# EAGLE board Qwiic_Pocket_Dev_ESP32_C6-Panel (EAGLE 9.6.2), part 1 of 2
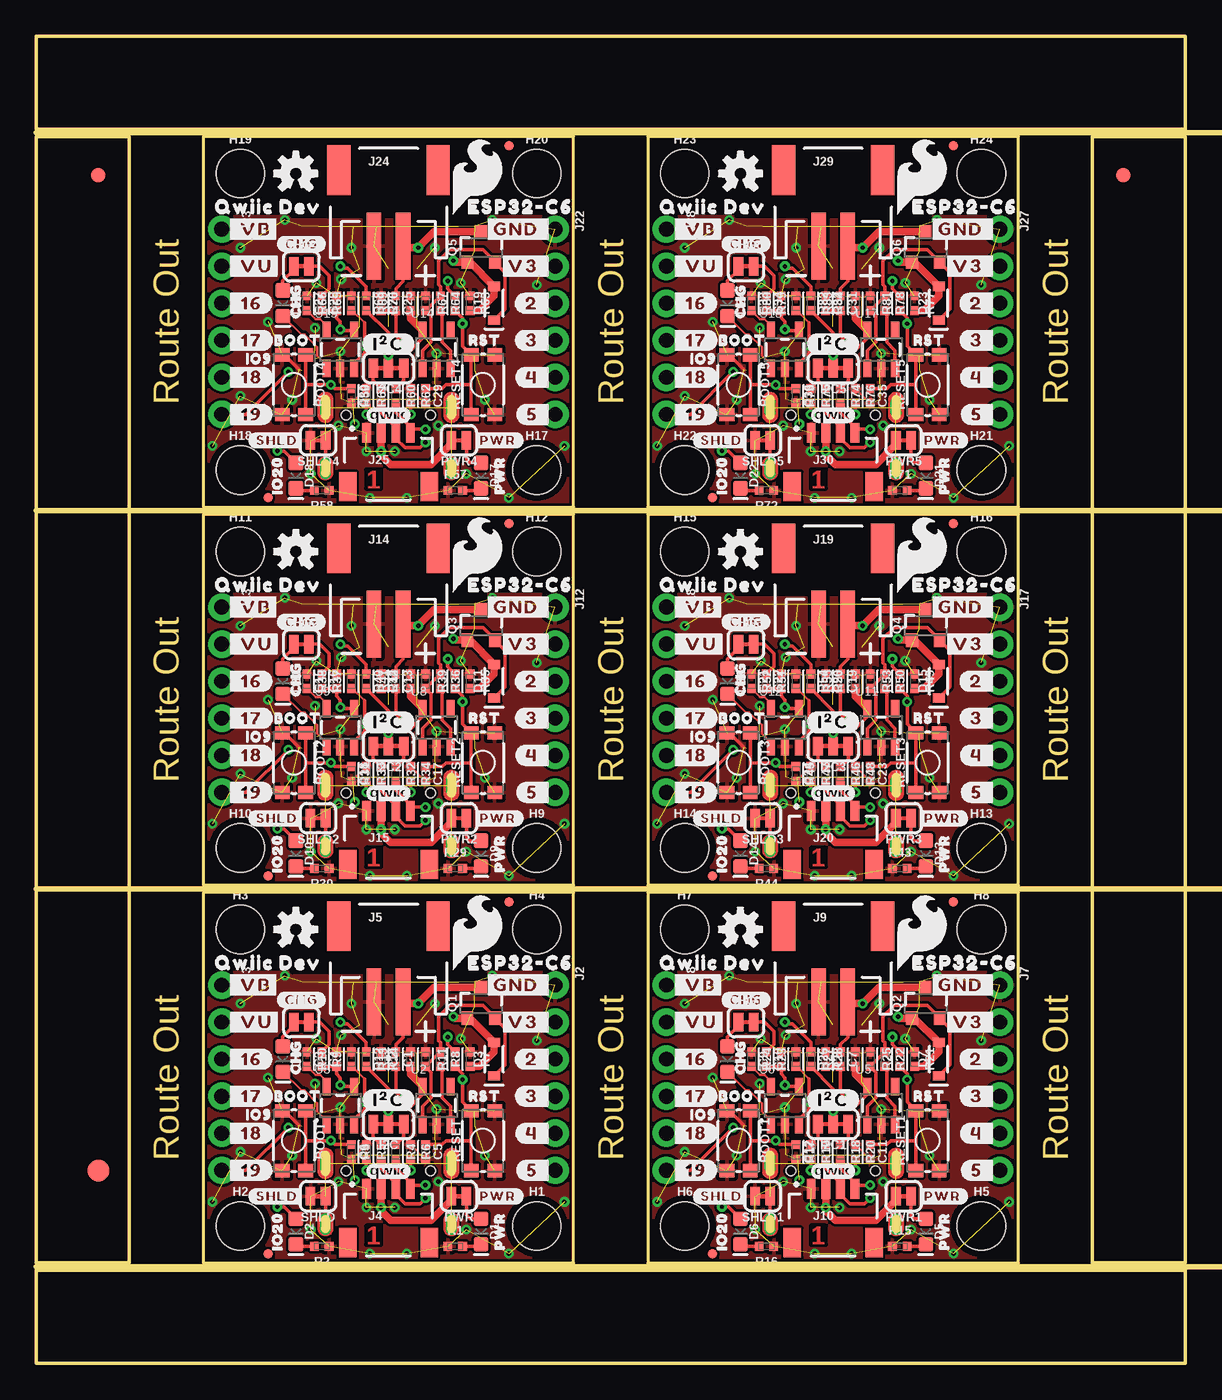
[diagram p0: board, top side]
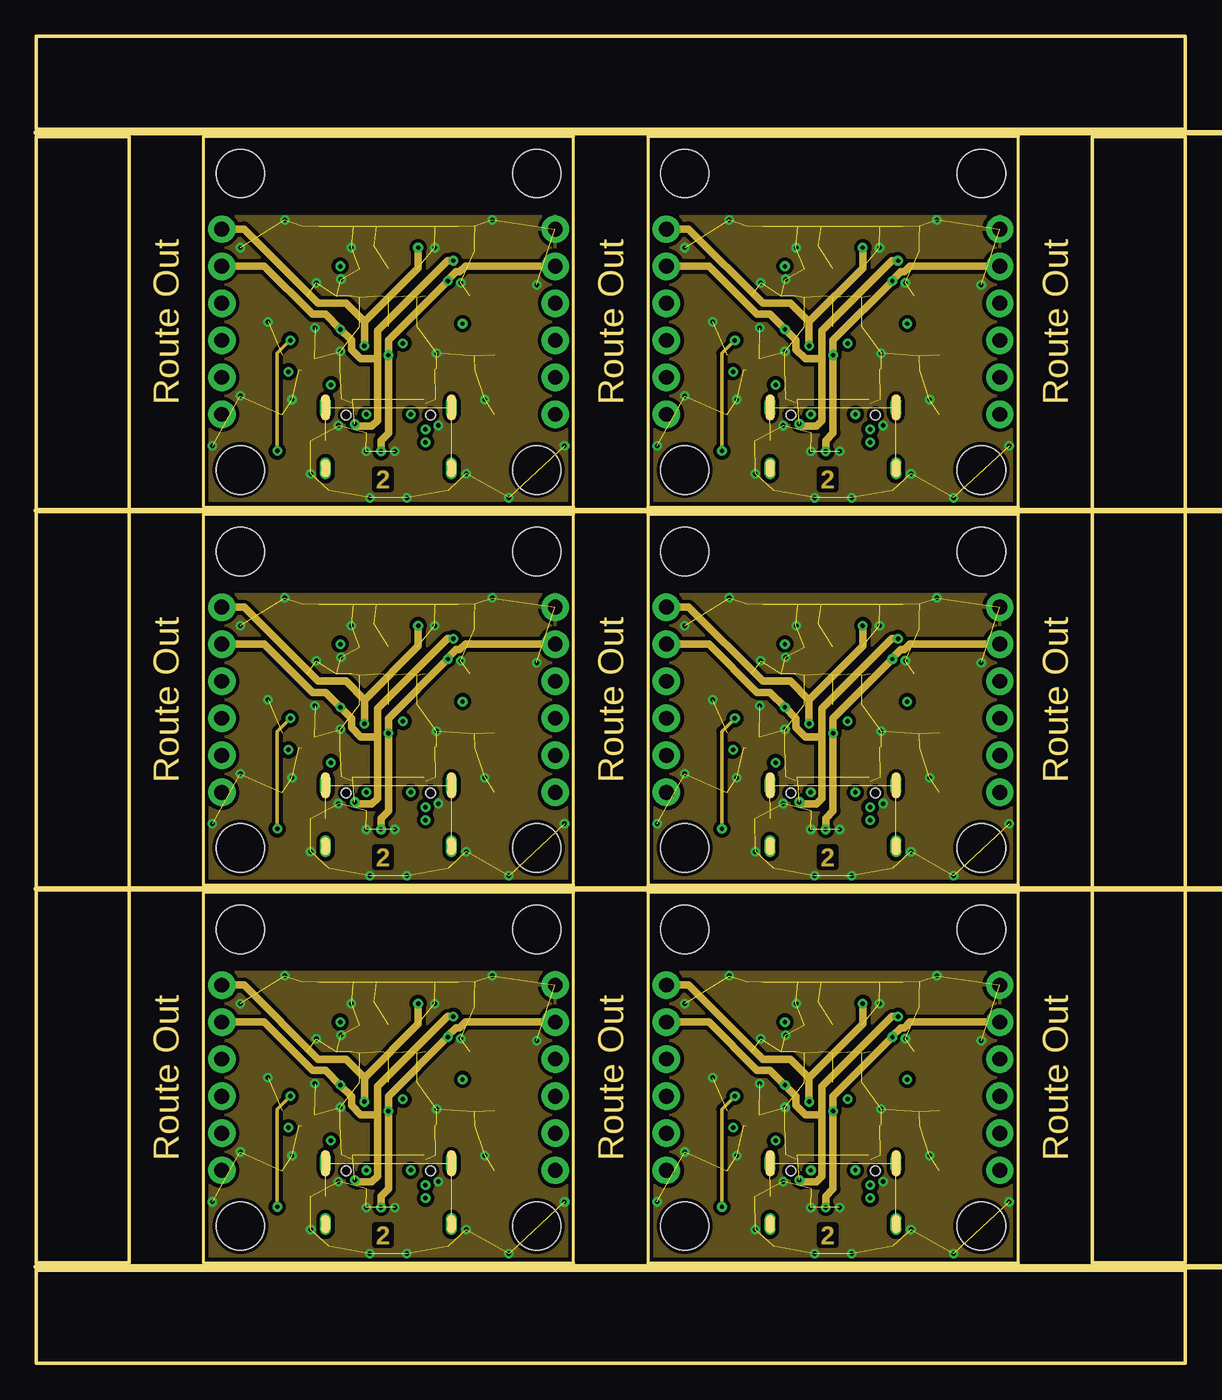
[diagram p1: board, inner layer Route2]
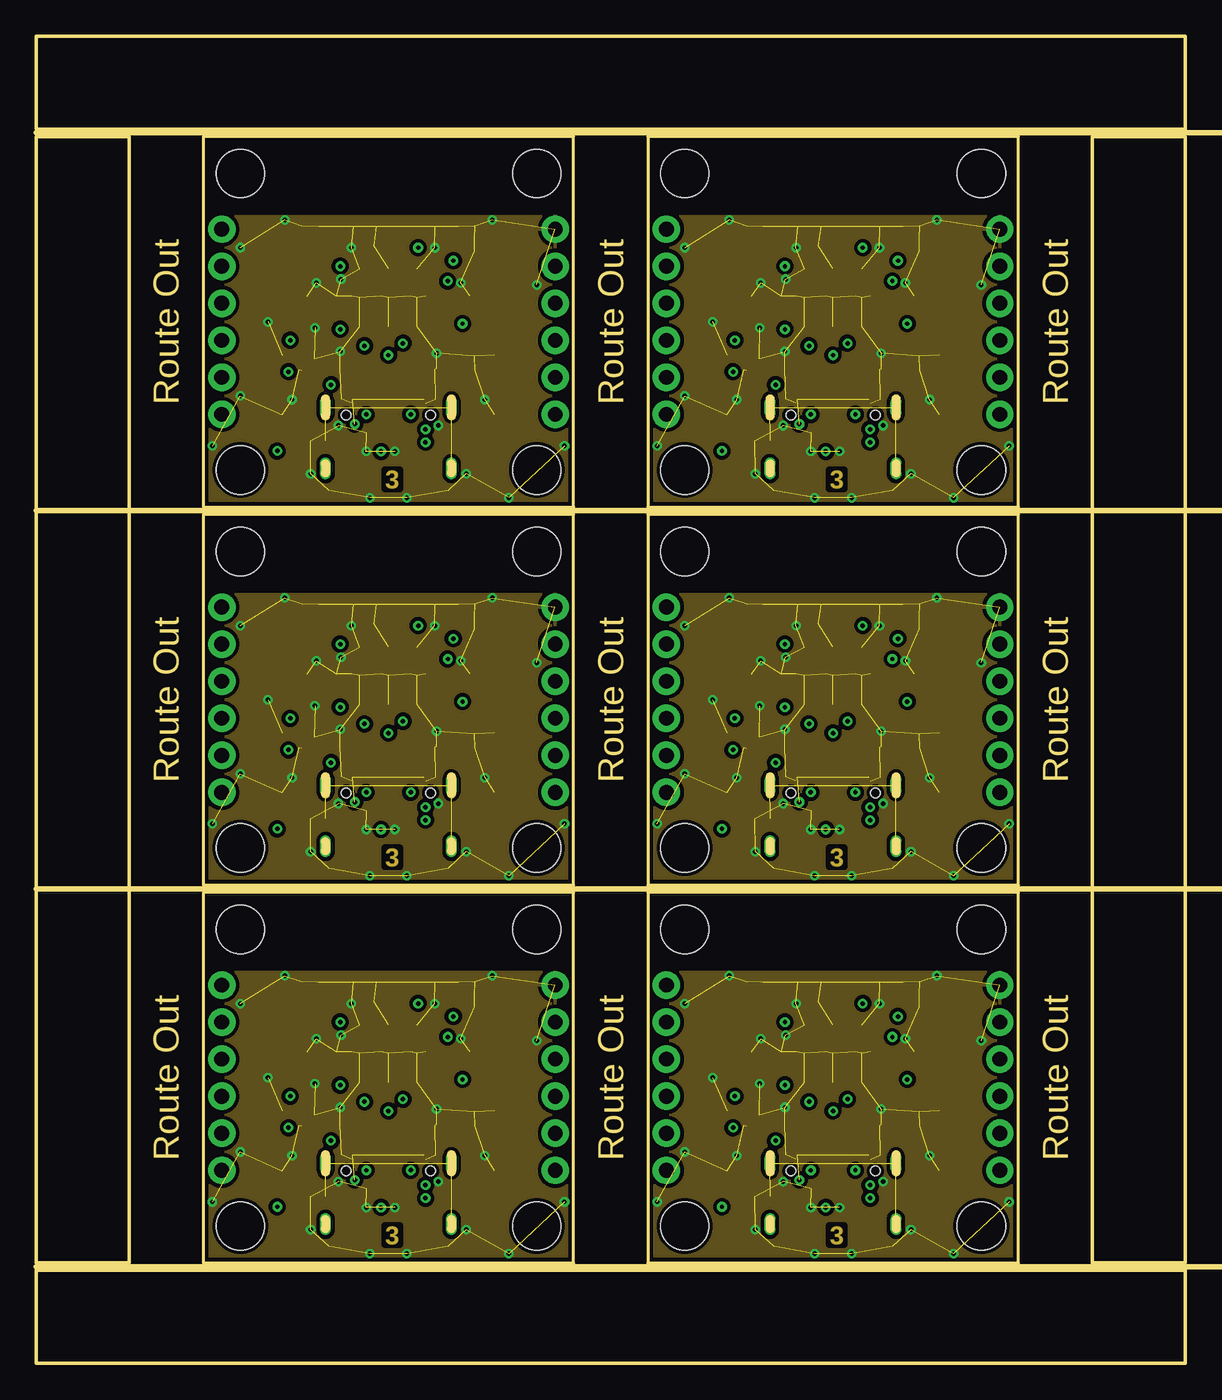
[diagram p2: board, inner layer Route15]
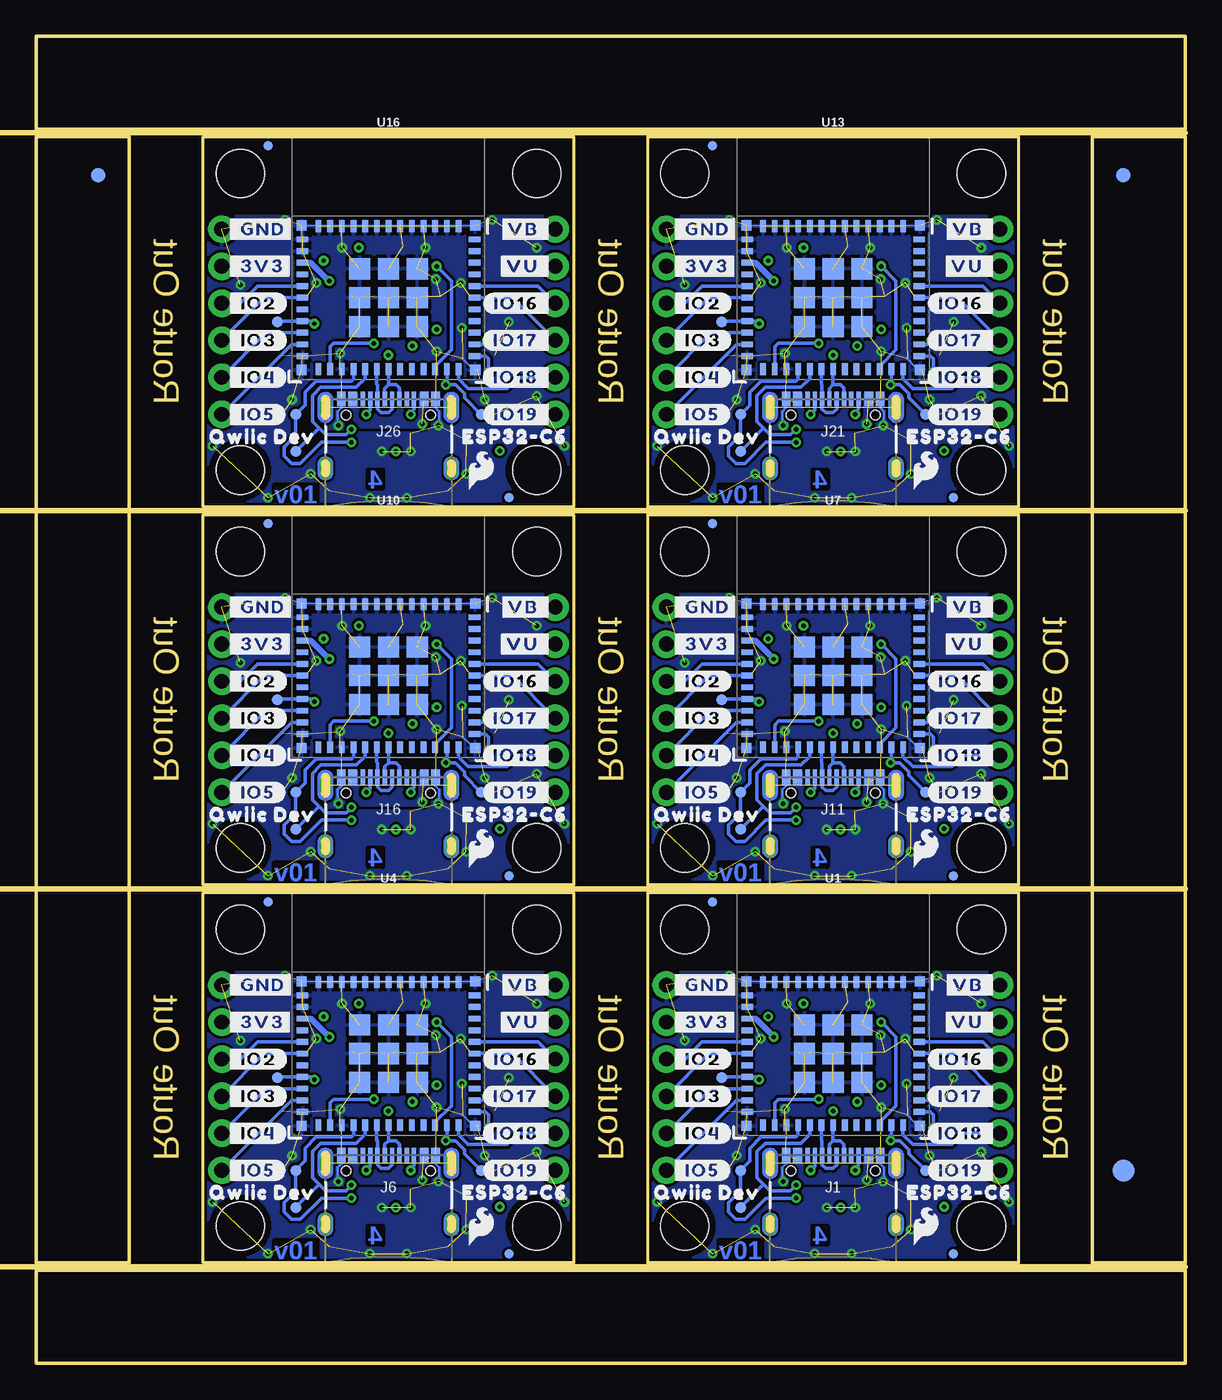
[diagram p3: board, bottom side, seen from below]

Size 78.74 x 90.93 mm. Coordinates in mm from the lower left corner, seen from the top.
Outline: 11.43,6.86 36.83,6.86 36.83,32.26 11.43,32.26 11.43,6.86
Outline: 41.91,6.86 67.31,6.86 67.31,32.26 41.91,32.26 41.91,6.86
Outline: 11.43,32.77 36.83,32.77 36.83,58.17 11.43,58.17 11.43,32.77
Outline: 41.91,32.77 67.31,32.77 67.31,58.17 41.91,58.17 41.91,32.77
Outline: 11.43,58.67 36.83,58.67 36.83,84.07 11.43,84.07 11.43,58.67
Outline: 41.91,58.67 67.31,58.67 67.31,84.07 41.91,84.07 41.91,58.67
Outline: 0,6.35 78.74,6.35 78.74,0 0,0 0,6.35
Outline: 72.39,84.07 78.74,84.07 78.74,6.86 72.39,6.86 72.39,84.07
Outline: 0,90.93 78.74,90.93 78.74,84.58 0,84.58 0,90.93
Outline: 0,84.07 6.35,84.07 6.35,6.86 0,6.86 0,84.07
Copper layers (1+2*15+16): Top 0.035559375mm / dielectric 0.47751875mm / Route2 0.035559375mm / dielectric 0.47751875mm / Route15 0.035559375mm / dielectric 0.47751875mm / Bottom 0.035559375mm
Design rules "Qwiic_Pocket_Dev_ESP32_C6": minimum track width 7mil, minimum drill 12mil, track to track 7mil, track to pad 7mil, pad to pad 7mil, via to via 7mil, smd to smd 7mil, copper to edge 7mil, drill to drill 7mil, minimum pad ring 7mil, minimum via ring 7mil, stop-mask expansion 3mil, vias tented up to drill 25mil, thermal gap 10mil
tRestrict: area 30.5,26.4 to 30.7,26.7; area 61,26.4 to 61.2,26.7; area 30.5,52.3 to 30.7,52.6; area 61,52.3 to 61.2,52.6; area 30.5,78.2 to 30.7,78.5; area 61,78.2 to 61.2,78.5
bRestrict: area 20.8,15 to 21.1,15.2; area 51.3,15 to 51.6,15.2; area 20.8,40.9 to 21.1,41.1; area 51.3,40.9 to 51.6,41.1; area 20.8,66.8 to 21.1,67.1; area 51.3,66.8 to 51.6,67.1
Milling: 4 lines

## Footprints (pad centres in the part's own frame; a part is rotated, then mirrored left to right if it is on the bottom)
TACTILE_SWITCH_SMD_4.6X2.8MM = smd 0.9 x 1: 1 -2.05,-0.8; 2 2.05,-0.8; 3 2.05,0.8; 4 -2.05,0.8
0402-TIGHT = smd 0.6 x 0.6: 1 -0.5,0; 2 0.5,0
SMT-JUMPER_2_NC_TRACE_SILK = smd 0.66 x 1.27: 1 -0.521,0; 2 0.521,0
LED-0603 = smd 1 x 1: A -0.877,0; C 0.877,0
SOD-323 = smd 0.63 x 0.83: A 1.15,0; C -1.15,0
FIDUCIAL-1X2 = smd 1 x 1: 1 0,0
FIDUCIAL-1.5X3 = smd 1.5 x 1.5: 1 0,0
FIDUCIAL-MICRO = smd 0.635 x 0.635: 1 0,0
STAND-OFF = hole 3.302: 0,0
SMT-JUMPER_3_2-NC_TRACE_SILK = smd 0.66 x 1.27: 1 -1.041,0; 2 0,0; 3 1.041,0
USB-C-16P_4LAYER-PADS = smd 0.3 x 1: A5 -1.25,-0.34; A6 -0.25,-0.34; A7 0.25,-0.34; A8 1.25,-0.34; B5 1.75,-0.34; B6 0.75,-0.34; B7 -0.75,-0.34; B8 -1.75,-0.34 | smd 0.6 x 1: GND -3.225,-0.34; GND2 3.225,-0.34; VBUS1 -2.45,-0.34; VBUS2 2.45,-0.34 | drill 0.4 pad 0.6 long: SHLD1 -4.318,-0.915; SHLD2 4.318,-0.915; SHLD3 -4.318,-5.095; SHLD4 4.318,-5.095 | hole 0.65: -2.89,-1.445; 2.89,-1.445
1X06_NO_SILK = drill 1.016 pad 1.88: 1 0,0; 2 2.54,0; 3 5.08,0; 4 7.62,0; 5 10.16,0; 6 12.7,0
JST04_1MM_RA = smd 0.6 x 1.35: 1 -1.5,0; 2 -0.5,0; 3 0.5,0; 4 1.5,0 | smd 1.2 x 2: NC1 2.8,-3.675; NC2 -2.8,-3.675
JST-2-SMD = smd 1 x 4.6: 1 -1,-3.7; 2 1,-3.7 | smd 1.6 x 3.4: NC1 -3.4,1.5; NC2 3.4,1.5
SOT23-3 = smd 0.8 x 0.9: 1 -0.95,-1; 2 0.95,-1; 3 0,1.1
PAD.03X.03 = smd 0.762 x 0.762: 1 0,0
ESP32-C6-MINI-1 = smd 0.8 x 0.4: 1 -5.9,4; 2 -5.9,3.2; 3 -5.9,2.4; 4 -5.9,1.6; 5 -5.9,0.8; 6 -5.9,0; 7 -5.9,-0.8; 8 -5.9,-1.6; 9 -5.9,-2.4; 10 -5.9,-3.2; 11 -5.9,-4; 25 5.9,-4; 26 5.9,-3.2; 27 5.9,-2.4; 28 5.9,-1.6; 29 5.9,-0.8; 30 5.9,0; 31 5.9,0.8; 32 5.9,1.6; 33 5.9,2.4; 34 5.9,3.2; 35 5.9,4 | smd 0.4 x 0.8: 12 -4.8,-4.9; 13 -4,-4.9; 14 -3.2,-4.9; 15 -2.4,-4.9; 16 -1.6,-4.9; 17 -0.8,-4.9; 18 0,-4.9; 19 0.8,-4.9; 20 1.6,-4.9; 21 2.4,-4.9; 22 3.2,-4.9; 23 4,-4.9; 24 4.8,-4.9; 36 4.8,4.9; 37 4,4.9; 38 3.2,4.9; 39 2.4,4.9; 40 1.6,4.9; 41 0.8,4.9; 42 0,4.9; 43 -0.8,4.9; 44 -1.6,4.9; 45 -2.4,4.9; 46 -3.2,4.9; 47 -4,4.9; 48 -4.8,4.9 | smd 1.45 x 1.45: 49.1 -1.975,1.975; 49.2 -1.975,0; 49.3 -1.975,-1.975; 49.4 0,-1.975; 49.5 1.975,-1.975; 49.6 1.975,0; 49.7 1.975,1.975; 49.8 0,1.975; 49.9 0,0 | smd 0.7 x 0.7: 50 5.95,4.95; 51 5.95,-4.95; 52 -5.95,-4.95; 53 -5.95,4.95
SOT23-5 = smd 0.55 x 1.2: 1 -0.95,-1.3; 2 0,-1.3; 3 0.95,-1.3; 4 0.95,1.3; 5 -0.95,1.3

## Placement (x,y rotation side)
BOOT  MOMENTARY-SWITCH-SPST-SMD-4.6X2.8MM  [TACTILE_SWITCH_SMD_4.6X2.8MM]  17.65,15.24 270 top
BOOT1  MOMENTARY-SWITCH-SPST-SMD-4.6X2.8MM  [TACTILE_SWITCH_SMD_4.6X2.8MM]  48.13,15.24 270 top
BOOT2  MOMENTARY-SWITCH-SPST-SMD-4.6X2.8MM  [TACTILE_SWITCH_SMD_4.6X2.8MM]  17.65,41.15 270 top
BOOT3  MOMENTARY-SWITCH-SPST-SMD-4.6X2.8MM  [TACTILE_SWITCH_SMD_4.6X2.8MM]  48.13,41.15 270 top
BOOT4  MOMENTARY-SWITCH-SPST-SMD-4.6X2.8MM  [TACTILE_SWITCH_SMD_4.6X2.8MM]  17.65,67.06 270 top
BOOT5  MOMENTARY-SWITCH-SPST-SMD-4.6X2.8MM  [TACTILE_SWITCH_SMD_4.6X2.8MM]  48.13,67.06 270 top
C1  2.2uF  [0402-TIGHT]  26.67,20.83 90 top
C2  2.2uF  [0402-TIGHT]  25.65,20.83 90 top
C3  2.2uF  [0402-TIGHT]  20.57,20.83 90 top
C4  2.2uF  [0402-TIGHT]  21.59,20.83 90 top
C5  0.1uF  [0402-TIGHT]  26.67,14.48 270 top
C6  0.1uF  [0402-TIGHT]  21.59,14.48 270 top
C7  2.2uF  [0402-TIGHT]  57.15,20.83 90 top
C8  2.2uF  [0402-TIGHT]  56.13,20.83 90 top
C9  2.2uF  [0402-TIGHT]  51.05,20.83 90 top
C10  2.2uF  [0402-TIGHT]  52.07,20.83 90 top
C11  0.1uF  [0402-TIGHT]  57.15,14.48 270 top
C12  0.1uF  [0402-TIGHT]  52.07,14.48 270 top
C13  2.2uF  [0402-TIGHT]  26.67,46.74 90 top
C14  2.2uF  [0402-TIGHT]  25.65,46.74 90 top
C15  2.2uF  [0402-TIGHT]  20.57,46.74 90 top
C16  2.2uF  [0402-TIGHT]  21.59,46.74 90 top
C17  0.1uF  [0402-TIGHT]  26.67,40.39 270 top
C18  0.1uF  [0402-TIGHT]  21.59,40.39 270 top
C19  2.2uF  [0402-TIGHT]  57.15,46.74 90 top
C20  2.2uF  [0402-TIGHT]  56.13,46.74 90 top
C21  2.2uF  [0402-TIGHT]  51.05,46.74 90 top
C22  2.2uF  [0402-TIGHT]  52.07,46.74 90 top
C23  0.1uF  [0402-TIGHT]  57.15,40.39 270 top
C24  0.1uF  [0402-TIGHT]  52.07,40.39 270 top
C25  2.2uF  [0402-TIGHT]  26.67,72.64 90 top
C26  2.2uF  [0402-TIGHT]  25.65,72.64 90 top
C27  2.2uF  [0402-TIGHT]  20.57,72.64 90 top
C28  2.2uF  [0402-TIGHT]  21.59,72.64 90 top
C29  0.1uF  [0402-TIGHT]  26.67,66.29 270 top
C30  0.1uF  [0402-TIGHT]  21.59,66.29 270 top
C31  2.2uF  [0402-TIGHT]  57.15,72.64 90 top
C32  2.2uF  [0402-TIGHT]  56.13,72.64 90 top
C33  2.2uF  [0402-TIGHT]  51.05,72.64 90 top
C34  2.2uF  [0402-TIGHT]  52.07,72.64 90 top
C35  0.1uF  [0402-TIGHT]  57.15,66.29 270 top
C36  0.1uF  [0402-TIGHT]  52.07,66.29 270 top
CHG  JUMPER-SMT_2_NC_TRACE_SILK  [SMT-JUMPER_2_NC_TRACE_SILK]  18.16,23.37 0 top
CHG1  JUMPER-SMT_2_NC_TRACE_SILK  [SMT-JUMPER_2_NC_TRACE_SILK]  48.64,23.37 0 top
CHG2  JUMPER-SMT_2_NC_TRACE_SILK  [SMT-JUMPER_2_NC_TRACE_SILK]  18.16,49.28 0 top
CHG3  JUMPER-SMT_2_NC_TRACE_SILK  [SMT-JUMPER_2_NC_TRACE_SILK]  48.64,49.28 0 top
CHG4  JUMPER-SMT_2_NC_TRACE_SILK  [SMT-JUMPER_2_NC_TRACE_SILK]  18.16,75.18 0 top
CHG5  JUMPER-SMT_2_NC_TRACE_SILK  [SMT-JUMPER_2_NC_TRACE_SILK]  48.64,75.18 0 top
D1  [LED-0603]  30.48,9.02 270 top
D2  BLUE  [LED-0603]  17.78,9.02 270 top
D3  1A/23V/620mV  [SOD-323]  31.37,20.83 90 top
D4  Yellow  [LED-0603]  16.89,20.83 270 top
D5  [LED-0603]  60.96,9.02 270 top
D6  BLUE  [LED-0603]  48.26,9.02 270 top
D7  1A/23V/620mV  [SOD-323]  61.85,20.83 90 top
D8  Yellow  [LED-0603]  47.37,20.83 270 top
D9  [LED-0603]  30.48,34.92 270 top
D10  BLUE  [LED-0603]  17.78,34.92 270 top
D11  1A/23V/620mV  [SOD-323]  31.37,46.74 90 top
D12  Yellow  [LED-0603]  16.89,46.74 270 top
D13  [LED-0603]  60.96,34.92 270 top
D14  BLUE  [LED-0603]  48.26,34.92 270 top
D15  1A/23V/620mV  [SOD-323]  61.85,46.74 90 top
D16  Yellow  [LED-0603]  47.37,46.74 270 top
D17  [LED-0603]  30.48,60.83 270 top
D18  BLUE  [LED-0603]  17.78,60.83 270 top
D19  1A/23V/620mV  [SOD-323]  31.37,72.64 90 top
D20  Yellow  [LED-0603]  16.89,72.64 270 top
D21  [LED-0603]  60.96,60.83 270 top
D22  BLUE  [LED-0603]  48.26,60.83 270 top
D23  1A/23V/620mV  [SOD-323]  61.85,72.64 90 top
D24  Yellow  [LED-0603]  47.37,72.64 270 top
E$1  [FIDUCIAL-1X2]  4.23,81.41 0 top
E$2  [FIDUCIAL-1X2]  4.23,81.41 0 bottom
E$3  [FIDUCIAL-1X2]  74.51,81.41 0 top
E$4  [FIDUCIAL-1X2]  74.51,81.41 0 bottom
E$5  [FIDUCIAL-1.5X3]  4.23,13.21 0 top
E$6  [FIDUCIAL-1.5X3]  4.23,13.21 0 bottom
FD1  FIDUCIALUFIDUCIAL  [FIDUCIAL-MICRO]  32.38,31.62 0 bottom
FD2  FIDUCIALUFIDUCIAL  [FIDUCIAL-MICRO]  32.38,31.62 0 top
FD3  FIDUCIALUFIDUCIAL  [FIDUCIAL-MICRO]  15.88,7.49 0 bottom
FD4  FIDUCIALUFIDUCIAL  [FIDUCIAL-MICRO]  15.88,7.49 0 top
FD5  FIDUCIALUFIDUCIAL  [FIDUCIAL-MICRO]  62.87,31.62 0 bottom
FD6  FIDUCIALUFIDUCIAL  [FIDUCIAL-MICRO]  62.87,31.62 0 top
FD7  FIDUCIALUFIDUCIAL  [FIDUCIAL-MICRO]  46.35,7.49 0 bottom
FD8  FIDUCIALUFIDUCIAL  [FIDUCIAL-MICRO]  46.35,7.49 0 top
FD9  FIDUCIALUFIDUCIAL  [FIDUCIAL-MICRO]  32.38,57.53 0 bottom
FD10  FIDUCIALUFIDUCIAL  [FIDUCIAL-MICRO]  32.38,57.53 0 top
FD11  FIDUCIALUFIDUCIAL  [FIDUCIAL-MICRO]  15.88,33.4 0 bottom
FD12  FIDUCIALUFIDUCIAL  [FIDUCIAL-MICRO]  15.88,33.4 0 top
FD13  FIDUCIALUFIDUCIAL  [FIDUCIAL-MICRO]  62.87,57.53 0 bottom
FD14  FIDUCIALUFIDUCIAL  [FIDUCIAL-MICRO]  62.87,57.53 0 top
FD15  FIDUCIALUFIDUCIAL  [FIDUCIAL-MICRO]  46.35,33.4 0 bottom
FD16  FIDUCIALUFIDUCIAL  [FIDUCIAL-MICRO]  46.35,33.4 0 top
FD17  FIDUCIALUFIDUCIAL  [FIDUCIAL-MICRO]  32.38,83.44 0 bottom
FD18  FIDUCIALUFIDUCIAL  [FIDUCIAL-MICRO]  32.38,83.44 0 top
FD19  FIDUCIALUFIDUCIAL  [FIDUCIAL-MICRO]  15.88,59.31 0 bottom
FD20  FIDUCIALUFIDUCIAL  [FIDUCIAL-MICRO]  15.88,59.31 0 top
FD21  FIDUCIALUFIDUCIAL  [FIDUCIAL-MICRO]  62.87,83.44 0 bottom
FD22  FIDUCIALUFIDUCIAL  [FIDUCIAL-MICRO]  62.87,83.44 0 top
FD23  FIDUCIALUFIDUCIAL  [FIDUCIAL-MICRO]  46.35,59.31 0 bottom
FD24  FIDUCIALUFIDUCIAL  [FIDUCIAL-MICRO]  46.35,59.31 0 top
FRAME1  FRAME-LETTER  [CREATIVE_COMMONS]  1.27,-18.54 0 top  (outside the outline)
FRAME2  FRAME-LETTER  [CREATIVE_COMMONS]  31.75,-18.54 0 top  (outside the outline)
FRAME3  FRAME-LETTER  [CREATIVE_COMMONS]  1.27,7.37 0 top
FRAME4  FRAME-LETTER  [CREATIVE_COMMONS]  31.75,7.37 0 top
FRAME5  FRAME-LETTER  [CREATIVE_COMMONS]  1.27,33.27 0 top
FRAME6  FRAME-LETTER  [CREATIVE_COMMONS]  31.75,33.27 0 top
H1  STAND-OFF  [STAND-OFF]  34.29,9.4 0 top
H2  STAND-OFF  [STAND-OFF]  13.97,9.4 0 top
H3  STAND-OFF  [STAND-OFF]  13.97,29.72 0 top
H4  STAND-OFF  [STAND-OFF]  34.29,29.72 0 top
H5  STAND-OFF  [STAND-OFF]  64.77,9.4 0 top
H6  STAND-OFF  [STAND-OFF]  44.45,9.4 0 top
H7  STAND-OFF  [STAND-OFF]  44.45,29.72 0 top
H8  STAND-OFF  [STAND-OFF]  64.77,29.72 0 top
H9  STAND-OFF  [STAND-OFF]  34.29,35.31 0 top
H10  STAND-OFF  [STAND-OFF]  13.97,35.31 0 top
H11  STAND-OFF  [STAND-OFF]  13.97,55.63 0 top
H12  STAND-OFF  [STAND-OFF]  34.29,55.63 0 top
H13  STAND-OFF  [STAND-OFF]  64.77,35.31 0 top
H14  STAND-OFF  [STAND-OFF]  44.45,35.31 0 top
H15  STAND-OFF  [STAND-OFF]  44.45,55.63 0 top
H16  STAND-OFF  [STAND-OFF]  64.77,55.63 0 top
H17  STAND-OFF  [STAND-OFF]  34.29,61.21 0 top
H18  STAND-OFF  [STAND-OFF]  13.97,61.21 0 top
H19  STAND-OFF  [STAND-OFF]  13.97,81.53 0 top
H20  STAND-OFF  [STAND-OFF]  34.29,81.53 0 top
H21  STAND-OFF  [STAND-OFF]  64.77,61.21 0 top
H22  STAND-OFF  [STAND-OFF]  44.45,61.21 0 top
H23  STAND-OFF  [STAND-OFF]  44.45,81.53 0 top
H24  STAND-OFF  [STAND-OFF]  64.77,81.53 0 top
I2C  JUMPER-SMT_3_2-NC_TRACE_SILK  [SMT-JUMPER_3_2-NC_TRACE_SILK]  24.13,16.38 180 top
I2C1  JUMPER-SMT_3_2-NC_TRACE_SILK  [SMT-JUMPER_3_2-NC_TRACE_SILK]  54.61,16.38 180 top
I2C2  JUMPER-SMT_3_2-NC_TRACE_SILK  [SMT-JUMPER_3_2-NC_TRACE_SILK]  24.13,42.29 180 top
I2C3  JUMPER-SMT_3_2-NC_TRACE_SILK  [SMT-JUMPER_3_2-NC_TRACE_SILK]  54.61,42.29 180 top
I2C4  JUMPER-SMT_3_2-NC_TRACE_SILK  [SMT-JUMPER_3_2-NC_TRACE_SILK]  24.13,68.2 180 top
I2C5  JUMPER-SMT_3_2-NC_TRACE_SILK  [SMT-JUMPER_3_2-NC_TRACE_SILK]  54.61,68.2 180 top
J1  USB Female Type C Connector  [USB-C-16P_4LAYER-PADS]  24.13,14.61 0 bottom
J2  [1X06_NO_SILK]  35.56,25.91 270 top
J3  [1X06_NO_SILK]  12.7,25.91 270 top
J4  QWIIC_RIGHT_ANGLE  [JST04_1MM_RA]  24.13,11.94 0 top
J5  [JST-2-SMD]  24.13,28.45 0 top
J6  USB Female Type C Connector  [USB-C-16P_4LAYER-PADS]  54.61,14.61 0 bottom
J7  [1X06_NO_SILK]  66.04,25.91 270 top
J8  [1X06_NO_SILK]  43.18,25.91 270 top
J9  [JST-2-SMD]  54.61,28.45 0 top
J10  QWIIC_RIGHT_ANGLE  [JST04_1MM_RA]  54.61,11.94 0 top
J11  USB Female Type C Connector  [USB-C-16P_4LAYER-PADS]  24.13,40.51 0 bottom
J12  [1X06_NO_SILK]  35.56,51.82 270 top
J13  [1X06_NO_SILK]  12.7,51.82 270 top
J14  [JST-2-SMD]  24.13,54.36 0 top
J15  QWIIC_RIGHT_ANGLE  [JST04_1MM_RA]  24.13,37.85 0 top
J16  USB Female Type C Connector  [USB-C-16P_4LAYER-PADS]  54.61,40.51 0 bottom
J17  [1X06_NO_SILK]  66.04,51.82 270 top
J18  [1X06_NO_SILK]  43.18,51.82 270 top
J19  [JST-2-SMD]  54.61,54.36 0 top
J20  QWIIC_RIGHT_ANGLE  [JST04_1MM_RA]  54.61,37.85 0 top
J21  USB Female Type C Connector  [USB-C-16P_4LAYER-PADS]  24.13,66.42 0 bottom
J22  [1X06_NO_SILK]  35.56,77.72 270 top
J23  [1X06_NO_SILK]  12.7,77.72 270 top
J24  [JST-2-SMD]  24.13,80.26 0 top
J25  QWIIC_RIGHT_ANGLE  [JST04_1MM_RA]  24.13,63.75 0 top
J26  USB Female Type C Connector  [USB-C-16P_4LAYER-PADS]  54.61,66.42 0 bottom
J27  [1X06_NO_SILK]  66.04,77.72 270 top
J28  [1X06_NO_SILK]  43.18,77.72 270 top
J29  [JST-2-SMD]  54.61,80.26 0 top
J30  QWIIC_RIGHT_ANGLE  [JST04_1MM_RA]  54.61,63.75 0 top
LOGO1  SFE_LOGO_NAME_FLAMEBLANK  [BLANK]  2.54,-18.54 0 top  (outside the outline)
LOGO2  OSHW-LOGOS  [OSHW-LOGO-S]  17.78,29.72 0 top
LOGO3  QWIIC_LOGO_3MM  [QWIIC_3MM]  24.13,13.14 0 top
LOGO4  SFE_LOGO_NAME_FLAMEBLANK  [BLANK]  33.02,-18.54 0 top  (outside the outline)
LOGO5  OSHW-LOGOS  [OSHW-LOGO-S]  48.26,29.72 0 top
LOGO6  QWIIC_LOGO_3MM  [QWIIC_3MM]  54.61,13.14 0 top
LOGO7  SFE_LOGO_NAME_FLAMEBLANK  [BLANK]  2.54,7.37 0 top
LOGO8  OSHW-LOGOS  [OSHW-LOGO-S]  17.78,55.63 0 top
LOGO9  QWIIC_LOGO_3MM  [QWIIC_3MM]  24.13,39.05 0 top
LOGO10  SFE_LOGO_NAME_FLAMEBLANK  [BLANK]  33.02,7.37 0 top
LOGO11  OSHW-LOGOS  [OSHW-LOGO-S]  48.26,55.63 0 top
LOGO12  QWIIC_LOGO_3MM  [QWIIC_3MM]  54.61,39.05 0 top
LOGO13  SFE_LOGO_NAME_FLAMEBLANK  [BLANK]  2.54,33.27 0 top
LOGO14  OSHW-LOGOS  [OSHW-LOGO-S]  17.78,81.53 0 top
LOGO15  QWIIC_LOGO_3MM  [QWIIC_3MM]  24.13,64.96 0 top
LOGO16  SFE_LOGO_NAME_FLAMEBLANK  [BLANK]  33.02,33.27 0 top
LOGO17  OSHW-LOGOS  [OSHW-LOGO-S]  48.26,81.53 0 top
LOGO18  QWIIC_LOGO_3MM  [QWIIC_3MM]  54.61,64.96 0 top
PWR  JUMPER-SMT_2_NC_TRACE_SILK  [SMT-JUMPER_2_NC_TRACE_SILK]  28.96,11.43 180 top
PWR1  JUMPER-SMT_2_NC_TRACE_SILK  [SMT-JUMPER_2_NC_TRACE_SILK]  59.44,11.43 180 top
PWR2  JUMPER-SMT_2_NC_TRACE_SILK  [SMT-JUMPER_2_NC_TRACE_SILK]  28.96,37.34 180 top
PWR3  JUMPER-SMT_2_NC_TRACE_SILK  [SMT-JUMPER_2_NC_TRACE_SILK]  59.44,37.34 180 top
PWR4  JUMPER-SMT_2_NC_TRACE_SILK  [SMT-JUMPER_2_NC_TRACE_SILK]  28.96,63.25 180 top
PWR5  JUMPER-SMT_2_NC_TRACE_SILK  [SMT-JUMPER_2_NC_TRACE_SILK]  59.44,63.25 180 top
Q1  20V/4.2A/52mΩ/1.4W  [SOT23-3]  30.48,24.64 0 top
Q2  20V/4.2A/52mΩ/1.4W  [SOT23-3]  60.96,24.64 0 top
Q3  20V/4.2A/52mΩ/1.4W  [SOT23-3]  30.48,50.55 0 top
Q4  20V/4.2A/52mΩ/1.4W  [SOT23-3]  60.96,50.55 0 top
Q5  20V/4.2A/52mΩ/1.4W  [SOT23-3]  30.48,76.45 0 top
Q6  20V/4.2A/52mΩ/1.4W  [SOT23-3]  60.96,76.45 0 top
R1  4.7k  [0402-TIGHT]  28.7,8 0 top
R2  2.2k  [0402-TIGHT]  19.56,8 180 top
R3  2.2k  [0402-TIGHT]  23.62,14.48 90 top
R4  2.2k  [0402-TIGHT]  24.64,14.48 270 top
R5  5.1k  [0402-TIGHT]  22.61,14.48 270 top
R6  5.1k  [0402-TIGHT]  25.65,14.48 270 top
R7  100k  [0402-TIGHT]  29.72,20.83 270 top
R8  100k  [0402-TIGHT]  27.69,20.83 270 top
R9  4.7k  [0402-TIGHT]  19.56,20.83 270 top
R10  4.7k  [0402-TIGHT]  18.54,20.83 270 top
R11  100k  [0402-TIGHT]  28.7,20.83 90 top
R12  100k  [0402-TIGHT]  22.61,20.83 270 top
R13  100k  [0402-TIGHT]  24.64,20.83 90 top
R14  100k  [0402-TIGHT]  23.62,20.83 270 top
R15  4.7k  [0402-TIGHT]  59.18,8 0 top
R16  2.2k  [0402-TIGHT]  50.04,8 180 top
R17  2.2k  [0402-TIGHT]  54.1,14.48 90 top
R18  2.2k  [0402-TIGHT]  55.12,14.48 270 top
R19  5.1k  [0402-TIGHT]  53.09,14.48 270 top
R20  5.1k  [0402-TIGHT]  56.13,14.48 270 top
R21  100k  [0402-TIGHT]  60.2,20.83 270 top
R22  100k  [0402-TIGHT]  58.17,20.83 270 top
R23  4.7k  [0402-TIGHT]  50.04,20.83 270 top
R24  4.7k  [0402-TIGHT]  49.02,20.83 270 top
R25  100k  [0402-TIGHT]  59.18,20.83 90 top
R26  100k  [0402-TIGHT]  53.09,20.83 270 top
R27  100k  [0402-TIGHT]  55.12,20.83 90 top
R28  100k  [0402-TIGHT]  54.1,20.83 270 top
R29  4.7k  [0402-TIGHT]  28.7,33.91 0 top
R30  2.2k  [0402-TIGHT]  19.56,33.91 180 top
R31  2.2k  [0402-TIGHT]  23.62,40.39 90 top
R32  2.2k  [0402-TIGHT]  24.64,40.39 270 top
R33  5.1k  [0402-TIGHT]  22.61,40.39 270 top
R34  5.1k  [0402-TIGHT]  25.65,40.39 270 top
R35  100k  [0402-TIGHT]  29.72,46.74 270 top
R36  100k  [0402-TIGHT]  27.69,46.74 270 top
R37  4.7k  [0402-TIGHT]  19.56,46.74 270 top
R38  4.7k  [0402-TIGHT]  18.54,46.74 270 top
R39  100k  [0402-TIGHT]  28.7,46.74 90 top
R40  100k  [0402-TIGHT]  22.61,46.74 270 top
R41  100k  [0402-TIGHT]  24.64,46.74 90 top
R42  100k  [0402-TIGHT]  23.62,46.74 270 top
R43  4.7k  [0402-TIGHT]  59.18,33.91 0 top
R44  2.2k  [0402-TIGHT]  50.04,33.91 180 top
R45  2.2k  [0402-TIGHT]  54.1,40.39 90 top
R46  2.2k  [0402-TIGHT]  55.12,40.39 270 top
R47  5.1k  [0402-TIGHT]  53.09,40.39 270 top
R48  5.1k  [0402-TIGHT]  56.13,40.39 270 top
R49  100k  [0402-TIGHT]  60.2,46.74 270 top
R50  100k  [0402-TIGHT]  58.17,46.74 270 top
R51  4.7k  [0402-TIGHT]  50.04,46.74 270 top
R52  4.7k  [0402-TIGHT]  49.02,46.74 270 top
R53  100k  [0402-TIGHT]  59.18,46.74 90 top
R54  100k  [0402-TIGHT]  53.09,46.74 270 top
R55  100k  [0402-TIGHT]  55.12,46.74 90 top
R56  100k  [0402-TIGHT]  54.1,46.74 270 top
R57  4.7k  [0402-TIGHT]  28.7,59.82 0 top
R58  2.2k  [0402-TIGHT]  19.56,59.82 180 top
R59  2.2k  [0402-TIGHT]  23.62,66.29 90 top
R60  2.2k  [0402-TIGHT]  24.64,66.29 270 top
R61  5.1k  [0402-TIGHT]  22.61,66.29 270 top
R62  5.1k  [0402-TIGHT]  25.65,66.29 270 top
R63  100k  [0402-TIGHT]  29.72,72.64 270 top
R64  100k  [0402-TIGHT]  27.69,72.64 270 top
R65  4.7k  [0402-TIGHT]  19.56,72.64 270 top
R66  4.7k  [0402-TIGHT]  18.54,72.64 270 top
R67  100k  [0402-TIGHT]  28.7,72.64 90 top
R68  100k  [0402-TIGHT]  22.61,72.64 270 top
R69  100k  [0402-TIGHT]  24.64,72.64 90 top
R70  100k  [0402-TIGHT]  23.62,72.64 270 top
R71  4.7k  [0402-TIGHT]  59.18,59.82 0 top
R72  2.2k  [0402-TIGHT]  50.04,59.82 180 top
R73  2.2k  [0402-TIGHT]  54.1,66.29 90 top
R74  2.2k  [0402-TIGHT]  55.12,66.29 270 top
R75  5.1k  [0402-TIGHT]  53.09,66.29 270 top
R76  5.1k  [0402-TIGHT]  56.13,66.29 270 top
R77  100k  [0402-TIGHT]  60.2,72.64 270 top
R78  100k  [0402-TIGHT]  58.17,72.64 270 top
R79  4.7k  [0402-TIGHT]  50.04,72.64 270 top
R80  4.7k  [0402-TIGHT]  49.02,72.64 270 top
R81  100k  [0402-TIGHT]  59.18,72.64 90 top
R82  100k  [0402-TIGHT]  53.09,72.64 270 top
R83  100k  [0402-TIGHT]  55.12,72.64 90 top
R84  100k  [0402-TIGHT]  54.1,72.64 270 top
RESET  MOMENTARY-SWITCH-SPST-SMD-4.6X2.8MM  [TACTILE_SWITCH_SMD_4.6X2.8MM]  30.61,15.24 90 top
RESET1  MOMENTARY-SWITCH-SPST-SMD-4.6X2.8MM  [TACTILE_SWITCH_SMD_4.6X2.8MM]  61.09,15.24 90 top
RESET2  MOMENTARY-SWITCH-SPST-SMD-4.6X2.8MM  [TACTILE_SWITCH_SMD_4.6X2.8MM]  30.61,41.15 90 top
RESET3  MOMENTARY-SWITCH-SPST-SMD-4.6X2.8MM  [TACTILE_SWITCH_SMD_4.6X2.8MM]  61.09,41.15 90 top
RESET4  MOMENTARY-SWITCH-SPST-SMD-4.6X2.8MM  [TACTILE_SWITCH_SMD_4.6X2.8MM]  30.61,67.06 90 top
RESET5  MOMENTARY-SWITCH-SPST-SMD-4.6X2.8MM  [TACTILE_SWITCH_SMD_4.6X2.8MM]  61.09,67.06 90 top
SHLD  JUMPER-SMT_2_NC_TRACE_SILK  [SMT-JUMPER_2_NC_TRACE_SILK]  19.3,11.43 180 top
SHLD1  JUMPER-SMT_2_NC_TRACE_SILK  [SMT-JUMPER_2_NC_TRACE_SILK]  49.78,11.43 180 top
SHLD2  JUMPER-SMT_2_NC_TRACE_SILK  [SMT-JUMPER_2_NC_TRACE_SILK]  19.3,37.34 180 top
SHLD3  JUMPER-SMT_2_NC_TRACE_SILK  [SMT-JUMPER_2_NC_TRACE_SILK]  49.78,37.34 180 top
SHLD4  JUMPER-SMT_2_NC_TRACE_SILK  [SMT-JUMPER_2_NC_TRACE_SILK]  19.3,63.25 180 top
SHLD5  JUMPER-SMT_2_NC_TRACE_SILK  [SMT-JUMPER_2_NC_TRACE_SILK]  49.78,63.25 180 top
TP1  TEST-POINT3  [PAD.03X.03]  30.48,10.67 0 bottom
TP2  TEST-POINT3  [PAD.03X.03]  30.48,13.21 0 bottom
TP3  TEST-POINT3  [PAD.03X.03]  17.78,13.21 0 bottom
TP4  TEST-POINT3  [PAD.03X.03]  31.75,19.56 0 bottom
TP5  TEST-POINT3  [PAD.03X.03]  60.96,10.67 0 bottom
TP6  TEST-POINT3  [PAD.03X.03]  60.96,13.21 0 bottom
TP7  TEST-POINT3  [PAD.03X.03]  48.26,13.21 0 bottom
TP8  TEST-POINT3  [PAD.03X.03]  62.23,19.56 0 bottom
TP9  TEST-POINT3  [PAD.03X.03]  30.48,36.58 0 bottom
TP10  TEST-POINT3  [PAD.03X.03]  30.48,39.12 0 bottom
TP11  TEST-POINT3  [PAD.03X.03]  17.78,39.12 0 bottom
TP12  TEST-POINT3  [PAD.03X.03]  31.75,45.47 0 bottom
TP13  TEST-POINT3  [PAD.03X.03]  60.96,36.58 0 bottom
TP14  TEST-POINT3  [PAD.03X.03]  60.96,39.12 0 bottom
TP15  TEST-POINT3  [PAD.03X.03]  48.26,39.12 0 bottom
TP16  TEST-POINT3  [PAD.03X.03]  62.23,45.47 0 bottom
TP17  TEST-POINT3  [PAD.03X.03]  30.48,62.48 0 bottom
TP18  TEST-POINT3  [PAD.03X.03]  30.48,65.02 0 bottom
TP19  TEST-POINT3  [PAD.03X.03]  17.78,65.02 0 bottom
TP20  TEST-POINT3  [PAD.03X.03]  31.75,71.37 0 bottom
TP21  TEST-POINT3  [PAD.03X.03]  60.96,62.48 0 bottom
TP22  TEST-POINT3  [PAD.03X.03]  60.96,65.02 0 bottom
TP23  TEST-POINT3  [PAD.03X.03]  48.26,65.02 0 bottom
TP24  TEST-POINT3  [PAD.03X.03]  62.23,71.37 0 bottom
U1  ESP32-C6-MINI-1  [ESP32-C6-MINI-1]  24.13,21.21 0 bottom
U2  RT9080-33GJ5  [SOT23-5]  27.43,17.65 0 top
U3  MCP73831  [SOT23-5]  20.83,17.65 0 top
U4  ESP32-C6-MINI-1  [ESP32-C6-MINI-1]  54.61,21.21 0 bottom
U5  RT9080-33GJ5  [SOT23-5]  57.91,17.65 0 top
U6  MCP73831  [SOT23-5]  51.31,17.65 0 top
U7  ESP32-C6-MINI-1  [ESP32-C6-MINI-1]  24.13,47.12 0 bottom
U8  RT9080-33GJ5  [SOT23-5]  27.43,43.56 0 top
U9  MCP73831  [SOT23-5]  20.83,43.56 0 top
U10  ESP32-C6-MINI-1  [ESP32-C6-MINI-1]  54.61,47.12 0 bottom
U11  RT9080-33GJ5  [SOT23-5]  57.91,43.56 0 top
U12  MCP73831  [SOT23-5]  51.31,43.56 0 top
U13  ESP32-C6-MINI-1  [ESP32-C6-MINI-1]  24.13,73.03 0 bottom
U14  RT9080-33GJ5  [SOT23-5]  27.43,69.47 0 top
U15  MCP73831  [SOT23-5]  20.83,69.47 0 top
U16  ESP32-C6-MINI-1  [ESP32-C6-MINI-1]  54.61,73.03 0 bottom
U17  RT9080-33GJ5  [SOT23-5]  57.91,69.47 0 top
U18  MCP73831  [SOT23-5]  51.31,69.47 0 top
U$1  [#_GND#0]  35.31,25.91 0 bottom
U$2  [#_3V3#0]  35.31,23.37 0 bottom
U$3  [#V3_#0]  35.43,23.37 0 top
U$4  [IO200]  16.51,9.02 90 top
U$5  [#GND_#0]  35.43,25.91 0 top
U$6  [SFE_LOGO_FLAME_.2]  30.23,29.46 0 top
U$7  [#VU_#0]  12.83,23.37 0 bottom
U$8  [#_VB#0]  12.95,25.91 0 top
U$9  [QWIIC_DEV0]  32.77,11.68 0 bottom
U$10  [SFE_LOGO_FLAME_.1]  17.78,9.4 0 bottom
U$11  [ESP32#C633]  15.49,11.68 0 bottom
U$12  [ESP32#C633]  33.15,27.43 0 top
U$13  [#_IO5#0]  35.31,13.21 0 bottom
U$14  [#_IO4#0]  35.31,15.75 0 bottom
U$15  [#_IO3#0]  35.31,18.29 0 bottom
U$16  [#_IO2#0]  35.31,20.83 0 bottom
U$17  [#IO16_#0]  12.83,20.83 0 bottom
U$18  [#IO17_#0]  12.83,18.29 0 bottom
U$19  [#IO18_#0]  12.83,15.75 0 bottom
U$20  [#IO19_#0]  12.83,13.21 0 bottom
U$21  [#5_#0]  35.43,13.21 0 top
U$22  [#4_#0]  35.43,15.75 0 top
U$23  [#I�C#0]  24.13,18.03 0 top
U$24  [#_GND#0]  65.79,25.91 0 bottom
U$25  [QWIIC_DEV0]  15.88,27.43 0 top
U$26  [#PWR#0]  29.84,11.43 0 top
U$27  [#SHLD#0]  18.41,11.43 0 top
U$28  [#_3V3#0]  65.79,23.37 0 bottom
U$29  [#PWR#0]  60.33,11.43 0 top
U$30  [PWR0]  31.75,9.02 90 top
U$31  [#CHG#0]  18.16,24.89 0 top
U$32  [CHG0]  17.78,20.95 90 top
U$33  [BOOT0]  17.91,18.29 0 top
U$34  [RST0]  30.73,18.29 0 top
U$35  [IO90]  15.24,17.02 0 top
U$36  [#VB_#0]  12.83,25.91 0 bottom
U$37  [#_VU#0]  12.95,23.37 0 top
U$38  [#3_#0]  35.43,18.29 0 top
U$39  [#2_#0]  35.43,20.83 0 top
U$40  [#_16#0]  12.95,20.83 0 top
U$41  [#_17#0]  12.95,18.29 0 top
U$42  [#_18#0]  12.95,15.75 0 top
U$43  [#_19#0]  12.95,13.21 0 top
U$44  [#SHLD#0]  48.9,11.43 0 top
U$45  [PWR0]  62.23,9.02 90 top
U$46  [#CHG#0]  48.64,24.89 0 top
U$47  [BOOT0]  48.39,18.29 0 top
U$48  [RST0]  61.21,18.29 0 top
U$49  [CHG0]  48.26,20.95 90 top
U$50  [IO90]  45.72,17.02 0 top
U$51  [#VB_#0]  43.31,25.91 0 bottom
U$52  [#_VU#0]  43.43,23.37 0 top
U$53  [#VU_#0]  43.31,23.37 0 bottom
U$54  [#_VB#0]  43.43,25.91 0 top
U$55  [#_IO5#0]  65.79,13.21 0 bottom
U$56  [#_IO4#0]  65.79,15.75 0 bottom
U$57  [#_IO3#0]  65.79,18.29 0 bottom
U$58  [#_IO2#0]  65.79,20.83 0 bottom
U$59  [#IO16_#0]  43.31,20.83 0 bottom
U$60  [#IO17_#0]  43.31,18.29 0 bottom
U$61  [#IO18_#0]  43.31,15.75 0 bottom
U$62  [#IO19_#0]  43.31,13.21 0 bottom
U$63  [#5_#0]  65.91,13.21 0 top
U$64  [#4_#0]  65.91,15.75 0 top
U$65  [#3_#0]  65.91,18.29 0 top
U$66  [#2_#0]  65.91,20.83 0 top
U$67  [#_16#0]  43.43,20.83 0 top
U$68  [#_17#0]  43.43,18.29 0 top
U$69  [#_18#0]  43.43,15.75 0 top
U$70  [#_19#0]  43.43,13.21 0 top
U$71  [#GND_#0]  65.91,25.91 0 top
U$72  [#V3_#0]  65.91,23.37 0 top
U$73  [IO200]  46.99,9.02 90 top
U$74  [SFE_LOGO_FLAME_.2]  60.71,29.46 0 top
U$75  [SFE_LOGO_FLAME_.1]  48.26,9.4 0 bottom
U$76  [ESP32#C633]  45.97,11.68 0 bottom
U$77  [ESP32#C633]  63.63,27.43 0 top
U$78  [#I�C#0]  54.61,18.03 0 top
U$79  [QWIIC_DEV0]  46.35,27.43 0 top
U$80  [QWIIC_DEV0]  63.25,11.68 0 bottom
U$81  [#_GND#0]  35.31,51.82 0 bottom
U$82  [#_3V3#0]  35.31,49.28 0 bottom
U$83  [#PWR#0]  29.84,37.34 0 top
U$84  [#SHLD#0]  18.41,37.34 0 top
U$85  [PWR0]  31.75,34.92 90 top
U$86  [#CHG#0]  18.16,50.8 0 top
U$87  [BOOT0]  17.91,44.2 0 top
U$88  [RST0]  30.73,44.2 0 top
U$89  [CHG0]  17.78,46.86 90 top
U$90  [IO90]  15.24,42.93 0 top
U$91  [#VB_#0]  12.83,51.82 0 bottom
U$92  [#_VU#0]  12.95,49.28 0 top
U$93  [#VU_#0]  12.83,49.28 0 bottom
U$94  [#_VB#0]  12.95,51.82 0 top
U$95  [#_IO5#0]  35.31,39.12 0 bottom
U$96  [#_IO4#0]  35.31,41.66 0 bottom
U$97  [#_IO3#0]  35.31,44.2 0 bottom
U$98  [#_IO2#0]  35.31,46.74 0 bottom
U$99  [#IO16_#0]  12.83,46.74 0 bottom
U$100  [#IO17_#0]  12.83,44.2 0 bottom
U$101  [#IO18_#0]  12.83,41.66 0 bottom
U$102  [#IO19_#0]  12.83,39.12 0 bottom
U$103  [#5_#0]  35.43,39.12 0 top
U$104  [#4_#0]  35.43,41.66 0 top
U$105  [#3_#0]  35.43,44.2 0 top
U$106  [#2_#0]  35.43,46.74 0 top
U$107  [#_16#0]  12.95,46.74 0 top
U$108  [#_17#0]  12.95,44.2 0 top
U$109  [#_18#0]  12.95,41.66 0 top
U$110  [#_19#0]  12.95,39.12 0 top
U$111  [#GND_#0]  35.43,51.82 0 top
U$112  [#V3_#0]  35.43,49.28 0 top
U$113  [IO200]  16.51,34.92 90 top
U$114  [SFE_LOGO_FLAME_.2]  30.23,55.37 0 top
U$115  [SFE_LOGO_FLAME_.1]  17.78,35.31 0 bottom
U$116  [ESP32#C633]  15.49,37.59 0 bottom
U$117  [ESP32#C633]  33.15,53.34 0 top
U$118  [#I�C#0]  24.13,43.94 0 top
U$119  [QWIIC_DEV0]  15.88,53.34 0 top
U$120  [QWIIC_DEV0]  32.77,37.59 0 bottom
U$121  [#_GND#0]  65.79,51.82 0 bottom
U$122  [#_3V3#0]  65.79,49.28 0 bottom
U$123  [#PWR#0]  60.33,37.34 0 top
U$124  [#SHLD#0]  48.9,37.34 0 top
U$125  [PWR0]  62.23,34.92 90 top
U$126  [#CHG#0]  48.64,50.8 0 top
U$127  [BOOT0]  48.39,44.2 0 top
U$128  [RST0]  61.21,44.2 0 top
U$129  [CHG0]  48.26,46.86 90 top
U$130  [IO90]  45.72,42.93 0 top
U$131  [#VB_#0]  43.31,51.82 0 bottom
U$132  [#_VU#0]  43.43,49.28 0 top
U$133  [#VU_#0]  43.31,49.28 0 bottom
U$134  [#_VB#0]  43.43,51.82 0 top
U$135  [#_IO5#0]  65.79,39.12 0 bottom
U$136  [#_IO4#0]  65.79,41.66 0 bottom
U$137  [#_IO3#0]  65.79,44.2 0 bottom
U$138  [#_IO2#0]  65.79,46.74 0 bottom
U$139  [#IO16_#0]  43.31,46.74 0 bottom
U$140  [#IO17_#0]  43.31,44.2 0 bottom
U$141  [#IO18_#0]  43.31,41.66 0 bottom
U$142  [#IO19_#0]  43.31,39.12 0 bottom
U$143  [#5_#0]  65.91,39.12 0 top
U$144  [#4_#0]  65.91,41.66 0 top
U$145  [#3_#0]  65.91,44.2 0 top
U$146  [#2_#0]  65.91,46.74 0 top
U$147  [#_16#0]  43.43,46.74 0 top
U$148  [#_17#0]  43.43,44.2 0 top
U$149  [#_18#0]  43.43,41.66 0 top
U$150  [#_19#0]  43.43,39.12 0 top
U$151  [#GND_#0]  65.91,51.82 0 top
U$152  [#V3_#0]  65.91,49.28 0 top
U$153  [IO200]  46.99,34.92 90 top
U$154  [SFE_LOGO_FLAME_.2]  60.71,55.37 0 top
U$155  [SFE_LOGO_FLAME_.1]  48.26,35.31 0 bottom
U$156  [ESP32#C633]  45.97,37.59 0 bottom
U$157  [ESP32#C633]  63.63,53.34 0 top
U$158  [#I�C#0]  54.61,43.94 0 top
U$159  [QWIIC_DEV0]  46.35,53.34 0 top
U$160  [QWIIC_DEV0]  63.25,37.59 0 bottom
U$161  [#_GND#0]  35.31,77.72 0 bottom
U$162  [#_3V3#0]  35.31,75.18 0 bottom
U$163  [#PWR#0]  29.84,63.25 0 top
U$164  [#SHLD#0]  18.41,63.25 0 top
U$165  [PWR0]  31.75,60.83 90 top
U$166  [#CHG#0]  18.16,76.71 0 top
U$167  [BOOT0]  17.91,70.1 0 top
U$168  [RST0]  30.73,70.1 0 top
U$169  [CHG0]  17.78,72.77 90 top
U$170  [IO90]  15.24,68.83 0 top
U$171  [#VB_#0]  12.83,77.72 0 bottom
U$172  [#_VU#0]  12.95,75.18 0 top
U$173  [#VU_#0]  12.83,75.18 0 bottom
U$174  [#_VB#0]  12.95,77.72 0 top
U$175  [#_IO5#0]  35.31,65.02 0 bottom
U$176  [#_IO4#0]  35.31,67.56 0 bottom
U$177  [#_IO3#0]  35.31,70.1 0 bottom
U$178  [#_IO2#0]  35.31,72.64 0 bottom
U$179  [#IO16_#0]  12.83,72.64 0 bottom
U$180  [#IO17_#0]  12.83,70.1 0 bottom
U$181  [#IO18_#0]  12.83,67.56 0 bottom
U$182  [#IO19_#0]  12.83,65.02 0 bottom
U$183  [#5_#0]  35.43,65.02 0 top
U$184  [#4_#0]  35.43,67.56 0 top
U$185  [#3_#0]  35.43,70.1 0 top
U$186  [#2_#0]  35.43,72.64 0 top
U$187  [#_16#0]  12.95,72.64 0 top
U$188  [#_17#0]  12.95,70.1 0 top
U$189  [#_18#0]  12.95,67.56 0 top
U$190  [#_19#0]  12.95,65.02 0 top
U$191  [#GND_#0]  35.43,77.72 0 top
U$192  [#V3_#0]  35.43,75.18 0 top
U$193  [IO200]  16.51,60.83 90 top
U$194  [SFE_LOGO_FLAME_.2]  30.23,81.28 0 top
U$195  [SFE_LOGO_FLAME_.1]  17.78,61.21 0 bottom
U$196  [ESP32#C633]  15.49,63.5 0 bottom
U$197  [ESP32#C633]  33.15,79.25 0 top
U$198  [#I�C#0]  24.13,69.85 0 top
U$199  [QWIIC_DEV0]  15.88,79.25 0 top
U$200  [QWIIC_DEV0]  32.77,63.5 0 bottom
U$201  [#_GND#0]  65.79,77.72 0 bottom
U$202  [#_3V3#0]  65.79,75.18 0 bottom
U$203  [#PWR#0]  60.33,63.25 0 top
U$204  [#SHLD#0]  48.9,63.25 0 top
U$205  [PWR0]  62.23,60.83 90 top
U$206  [#CHG#0]  48.64,76.71 0 top
U$207  [BOOT0]  48.39,70.1 0 top
U$208  [RST0]  61.21,70.1 0 top
U$209  [CHG0]  48.26,72.77 90 top
U$210  [IO90]  45.72,68.83 0 top
U$211  [#VB_#0]  43.31,77.72 0 bottom
U$212  [#_VU#0]  43.43,75.18 0 top
U$213  [#VU_#0]  43.31,75.18 0 bottom
U$214  [#_VB#0]  43.43,77.72 0 top
U$215  [#_IO5#0]  65.79,65.02 0 bottom
U$216  [#_IO4#0]  65.79,67.56 0 bottom
U$217  [#_IO3#0]  65.79,70.1 0 bottom
U$218  [#_IO2#0]  65.79,72.64 0 bottom
U$219  [#IO16_#0]  43.31,72.64 0 bottom
U$220  [#IO17_#0]  43.31,70.1 0 bottom
U$221  [#IO18_#0]  43.31,67.56 0 bottom
U$222  [#IO19_#0]  43.31,65.02 0 bottom
U$223  [#5_#0]  65.91,65.02 0 top
U$224  [#4_#0]  65.91,67.56 0 top
U$225  [#3_#0]  65.91,70.1 0 top
U$226  [#2_#0]  65.91,72.64 0 top
U$227  [#_16#0]  43.43,72.64 0 top
U$228  [#_17#0]  43.43,70.1 0 top
U$229  [#_18#0]  43.43,67.56 0 top
U$230  [#_19#0]  43.43,65.02 0 top
U$231  [#GND_#0]  65.91,77.72 0 top
U$232  [#V3_#0]  65.91,75.18 0 top
U$233  [IO200]  46.99,60.83 90 top
U$234  [SFE_LOGO_FLAME_.2]  60.71,81.28 0 top
U$235  [SFE_LOGO_FLAME_.1]  48.26,61.21 0 bottom
U$236  [ESP32#C633]  45.97,63.5 0 bottom
U$237  [ESP32#C633]  63.63,79.25 0 top
U$238  [#I�C#0]  54.61,69.85 0 top
U$239  [QWIIC_DEV0]  46.35,79.25 0 top
U$240  [QWIIC_DEV0]  63.25,63.5 0 bottom

## Library data of the parts
BOOT BOOT1-BOOT5 RESET RESET1-RESET5 = SparkFun-Switches; PROD_ID: SWCH-15606
C1-C4 C7-C10 C13-C16 C19-C22 C25-C28 C31-C34 = SparkFun-Capacitors; PROD_ID: CAP-14232
C5 C6 C11 C12 C17 C18 C23 C24 C29 C30 C35 C36 = SparkFun-Capacitors; PROD_ID: CAP-14993
CHG CHG1-CHG5 I2C I2C1-I2C5 PWR PWR1-PWR5 SHLD SHLD1-SHLD5 = SparkFun-Jumpers
D1 D5 D9 D13 D17 D21 = SparkFun-LED; PROD_ID: DIO-17976
D2 D6 D10 D14 D18 D22 = SparkFun-LED; PROD_ID: DIO-08575
D3 D7 D11 D15 D19 D23 = SparkFun-DiscreteSemi; PROD_ID: DIO-11623
D4 D8 D12 D16 D20 D24 = SparkFun-LED; PROD_ID: DIO-09003
E$1-E$4 FD1-FD24 LOGO1-LOGO18 U$6 U$10 U$74 U$75 U$114 U$115 U$154 U$155 U$194 U$195 U$234 U$235 = SparkFun-Aesthetics
E$5 E$6 = SparkFun-Retired
FRAME1-FRAME6 = SparkFun-Aesthetics; DESIGNER: Dryw Wade; REV: v01
H1-H24 = SparkFun-Hardware
J1 J6 J11 J16 J21 J26 = SparkFun-Connectors; PROD_ID: CONN-14122
J2 J3 J7 J8 J12 J13 J17 J18 J22 J23 J27 J28 TP1-TP24 = SparkFun-Connectors
J4 J10 J15 J20 J25 J30 = SparkFun-Connectors; PROD_ID: CONN-13694
J5 J9 J14 J19 J24 J29 = SparkFun-Connectors; PROD_ID: CONN-11443; SF_ID: PRT-08612
Q1-Q6 = SparkFun-DiscreteSemi; PROD_ID: TRANS-14388
R1 R9 R10 R15 R23 R24 R29 R37 R38 R43 R51 R52 R57 R65 R66 R71 R79 R80 = SparkFun-Resistors; PROD_ID: RES-15343
R2-R4 R16-R18 R30-R32 R44-R46 R58-R60 R72-R74 = SparkFun-Resistors; PROD_ID: RES-14341
R5 R6 R19 R20 R33 R34 R47 R48 R61 R62 R75 R76 = SparkFun-Resistors; PROD_ID: RES-14340
R7 R8 R11-R14 R21 R22 R25-R28 R35 R36 R39-R42 R49 R50 R53-R56 R63 R64 R67-R70 R77 R78 R81-R84 = SparkFun-Resistors; PROD_ID: RES-13495
U1 U4 U7 U10 U13 U16 = ESP32-C6-MINI-1; PROD_ID: IC-19033
U2 U5 U8 U11 U14 U17 = SparkFun-IC-Power; PROD_ID: VREG-19034
U3 U6 U9 U12 U15 U18 = SparkFun-IC-Power; PROD_ID: IC-09995
U$1-U$5 U$7-U$9 U$11-U$73 U$76-U$113 U$116-U$153 U$156-U$193 U$196-U$233 U$236-U$240 = output

## Nets
3.3V: C2.1 I2C.2 J2.2 J4.2 PWR.2 R11.2 R12.2 U1.3 U2.5
3.3V1: C8.1 I2C1.2 J7.2 J10.2 PWR1.2 R25.2 R26.2 U4.3 U5.5
3.3V2: C14.1 I2C2.2 J12.2 J15.2 PWR2.2 R39.2 R40.2 U7.3 U8.5
3.3V3: C20.1 I2C3.2 J17.2 J20.2 PWR3.2 R53.2 R54.2 U10.3 U11.5
3.3V4: C26.1 I2C4.2 J22.2 J25.2 PWR4.2 R67.2 R68.2 U13.3 U14.5
3.3V5: C32.1 I2C5.2 J27.2 J30.2 PWR5.2 R81.2 R82.2 U16.3 U17.5
EN: C5.1 R11.1 RESET.3 RESET.4 TP4.1 U1.8
EN1: C11.1 R25.1 RESET1.3 RESET1.4 TP8.1 U4.8
EN2: C17.1 R39.1 RESET2.3 RESET2.4 TP12.1 U7.8
EN3: C23.1 R53.1 RESET3.3 RESET3.4 TP16.1 U10.8
EN4: C29.1 R67.1 RESET4.3 RESET4.4 TP20.1 U13.8
EN5: C35.1 R81.1 RESET5.3 RESET5.4 TP24.1 U16.8
GND: BOOT.1 BOOT.2 C1.2 C2.2 C3.2 C4.2 C5.2 C6.2 J1.GND J1.GND2 J2.1 J4.1 J5.1 R1.1 R2.1 R5.1 R6.1 R7.1 R10.1 R14.1 RESET.1 RESET.2 SHLD.2 U1.1 U1.2 U1.11 U1.14 U1.36 U1.37 U1.38 U1.39 U1.40 U1.41 U1.42 U1.43 U1.44 U1.45 U1.46 U1.47 U1.48 U1.49.1 U1.49.2 U1.49.3 U1.49.4 U1.49.5 U1.49.6 U1.49.7 U1.49.8 U1.49.9 U1.50 U1.51 U1.52 U1.53 U2.2 U3.2
GND1: BOOT1.1 BOOT1.2 C7.2 C8.2 C9.2 C10.2 C11.2 C12.2 J6.GND J6.GND2 J7.1 J9.1 J10.1 R15.1 R16.1 R19.1 R20.1 R21.1 R24.1 R28.1 RESET1.1 RESET1.2 SHLD1.2 U4.1 U4.2 U4.11 U4.14 U4.36 U4.37 U4.38 U4.39 U4.40 U4.41 U4.42 U4.43 U4.44 U4.45 U4.46 U4.47 U4.48 U4.49.1 U4.49.2 U4.49.3 U4.49.4 U4.49.5 U4.49.6 U4.49.7 U4.49.8 U4.49.9 U4.50 U4.51 U4.52 U4.53 U5.2 U6.2
GND2: BOOT2.1 BOOT2.2 C13.2 C14.2 C15.2 C16.2 C17.2 C18.2 J11.GND J11.GND2 J12.1 J14.1 J15.1 R29.1 R30.1 R33.1 R34.1 R35.1 R38.1 R42.1 RESET2.1 RESET2.2 SHLD2.2 U7.1 U7.2 U7.11 U7.14 U7.36 U7.37 U7.38 U7.39 U7.40 U7.41 U7.42 U7.43 U7.44 U7.45 U7.46 U7.47 U7.48 U7.49.1 U7.49.2 U7.49.3 U7.49.4 U7.49.5 U7.49.6 U7.49.7 U7.49.8 U7.49.9 U7.50 U7.51 U7.52 U7.53 U8.2 U9.2
GND3: BOOT3.1 BOOT3.2 C19.2 C20.2 C21.2 C22.2 C23.2 C24.2 J16.GND J16.GND2 J17.1 J19.1 J20.1 R43.1 R44.1 R47.1 R48.1 R49.1 R52.1 R56.1 RESET3.1 RESET3.2 SHLD3.2 U10.1 U10.2 U10.11 U10.14 U10.36 U10.37 U10.38 U10.39 U10.40 U10.41 U10.42 U10.43 U10.44 U10.45 U10.46 U10.47 U10.48 U10.49.1 U10.49.2 U10.49.3 U10.49.4 U10.49.5 U10.49.6 U10.49.7 U10.49.8 U10.49.9 U10.50 U10.51 U10.52 U10.53 U11.2 U12.2
GND4: BOOT4.1 BOOT4.2 C25.2 C26.2 C27.2 C28.2 C29.2 C30.2 J21.GND J21.GND2 J22.1 J24.1 J25.1 R57.1 R58.1 R61.1 R62.1 R63.1 R66.1 R70.1 RESET4.1 RESET4.2 SHLD4.2 U13.1 U13.2 U13.11 U13.14 U13.36 U13.37 U13.38 U13.39 U13.40 U13.41 U13.42 U13.43 U13.44 U13.45 U13.46 U13.47 U13.48 U13.49.1 U13.49.2 U13.49.3 U13.49.4 U13.49.5 U13.49.6 U13.49.7 U13.49.8 U13.49.9 U13.50 U13.51 U13.52 U13.53 U14.2 U15.2
GND5: BOOT5.1 BOOT5.2 C31.2 C32.2 C33.2 C34.2 C35.2 C36.2 J26.GND J26.GND2 J27.1 J29.1 J30.1 R71.1 R72.1 R75.1 R76.1 R77.1 R80.1 R84.1 RESET5.1 RESET5.2 SHLD5.2 U16.1 U16.2 U16.11 U16.14 U16.36 U16.37 U16.38 U16.39 U16.40 U16.41 U16.42 U16.43 U16.44 U16.45 U16.46 U16.47 U16.48 U16.49.1 U16.49.2 U16.49.3 U16.49.4 U16.49.5 U16.49.6 U16.49.7 U16.49.8 U16.49.9 U16.50 U16.51 U16.52 U16.53 U17.2 U18.2
IO1: J7.5 U4.9
IO1/V_BATT_1: R27.1 R28.2 U4.13
IO1/V_BATT_2: R13.1 R14.2 U1.13
IO1/V_BATT_3: R41.1 R42.2 U7.13
IO1/V_BATT_4: R55.1 R56.2 U10.13
IO1/V_BATT_5: R69.1 R70.2 U13.13
IO1/V_BATT_6: R83.1 R84.2 U16.13
IO2: J2.3 U1.5
IO3: J2.4 U1.6
IO4: J2.5 U1.9
IO5: J2.6 U1.10
IO6: J7.6 U4.10
IO6/SDA: J4.3 R3.1 TP2.1 U1.15
IO6/SDA1: J10.3 R17.1 TP6.1 U4.15
IO6/SDA2: J15.3 R31.1 TP10.1 U7.15
IO6/SDA3: J20.3 R45.1 TP14.1 U10.15
IO6/SDA4: J25.3 R59.1 TP18.1 U13.15
IO6/SDA5: J30.3 R73.1 TP22.1 U16.15
IO7: J7.3 U4.5
IO7/SCL: J4.4 R4.2 TP1.1 U1.16
IO7/SCL1: J10.4 R18.2 TP5.1 U4.16
IO7/SCL2: J15.4 R32.2 TP9.1 U7.16
IO7/SCL3: J20.4 R46.2 TP13.1 U10.16
IO7/SCL4: J25.4 R60.2 TP17.1 U13.16
IO7/SCL5: J30.4 R74.2 TP21.1 U16.16
IO8: J7.4 U4.6
IO9: J8.5 U4.24
IO9/BOOT: BOOT.3 BOOT.4 C6.1 TP3.1 U1.23
IO9/BOOT1: BOOT1.3 BOOT1.4 C12.1 TP7.1 U4.23
IO9/BOOT2: BOOT2.3 BOOT2.4 C18.1 TP11.1 U7.23
IO9/BOOT3: BOOT3.3 BOOT3.4 C24.1 TP15.1 U10.23
IO9/BOOT4: BOOT4.3 BOOT4.4 C30.1 TP19.1 U13.23
IO9/BOOT5: BOOT5.3 BOOT5.4 C36.1 TP23.1 U16.23
IO10: J8.6 U4.25
IO11: J12.5 U7.9
IO12: J12.6 U7.10
IO12/USB_N: J1.A7 J1.B7 U1.17
IO12/USB_N1: J6.A7 J6.B7 U4.17
IO12/USB_N2: J11.A7 J11.B7 U7.17
IO12/USB_N3: J16.A7 J16.B7 U10.17
IO12/USB_N4: J21.A7 J21.B7 U13.17
IO12/USB_N5: J26.A7 J26.B7 U16.17
IO13: J12.3 U7.5
IO13/USB_P: J1.A6 J1.B6 U1.18
IO13/USB_P1: J6.A6 J6.B6 U4.18
IO13/USB_P2: J11.A6 J11.B6 U7.18
IO13/USB_P3: J16.A6 J16.B6 U10.18
IO13/USB_P4: J21.A6 J21.B6 U13.18
IO13/USB_P5: J26.A6 J26.B6 U16.18
IO14: J12.4 U7.6
IO15: J13.5 U7.24
IO16: J13.6 U7.25
IO16/TX: J3.3 U1.31
IO16/TX1: J8.3 U4.31
IO16/TX2: J13.3 U7.31
IO16/TX3: J18.3 U10.31
IO16/TX4: J23.3 U13.31
IO16/TX5: J28.3 U16.31
IO17: J17.5 U10.9
IO17/RX: J3.4 U1.30
IO17/RX1: J8.4 U4.30
IO17/RX2: J13.4 U7.30
IO17/RX3: J18.4 U10.30
IO17/RX4: J23.4 U13.30
IO17/RX5: J28.4 U16.30
IO18: J3.5 U1.24
IO19: J3.6 U1.25
IO20: J17.6 U10.10
IO20/STAT: D2.A U1.26
IO20/STAT1: D6.A U4.26
IO20/STAT2: D10.A U7.26
IO20/STAT3: D14.A U10.26
IO20/STAT4: D18.A U13.26
IO20/STAT5: D22.A U16.26
IO21: J17.3 U10.5
IO22: J17.4 U10.6
IO23: J18.5 U10.24
IO24: J18.6 U10.25
IO25: J22.5 U13.9
IO26: J22.6 U13.10
IO27: J22.3 U13.5
IO28: J22.4 U13.6
IO29: J23.5 U13.24
IO30: J23.6 U13.25
IO31: J27.5 U16.9
IO32: J27.6 U16.10
IO33: J27.3 U16.5
IO34: J27.4 U16.6
IO35: J28.5 U16.24
IO36: J28.6 U16.25
N$1: D1.C R1.2
N$2: D1.A PWR.1
N$3: D2.C R2.2
N$4: I2C.3 R3.2
N$5: I2C.1 R4.1
N$6: R8.2 U2.3
N$7: J1.B5 R5.2
N$8: J1.A5 R6.2
N$9: C1.1 D3.C Q1.2 R8.1 U2.1
N$10: D4.C U3.1
N$11: CHG.1 D4.A
N$12: CHG.2 R9.1
N$13: R10.2 U3.5
N$14: R12.1 U1.22
N$15: I2C1.3 R17.2
N$16: I2C1.1 R18.1
N$17: J6.B5 R19.2
N$18: J6.A5 R20.2
N$19: R22.2 U5.3
N$20: C7.1 D7.C Q2.2 R22.1 U5.1
N$21: D8.C U6.1
N$22: CHG1.1 D8.A
N$23: CHG1.2 R23.1
N$24: R24.2 U6.5
N$25: D5.C R15.2
N$26: D5.A PWR1.1
N$27: D6.C R16.2
N$28: R26.1 U4.22
N$29: I2C2.3 R31.2
N$30: I2C2.1 R32.1
N$31: J11.B5 R33.2
N$32: J11.A5 R34.2
N$33: R36.2 U8.3
N$34: C13.1 D11.C Q3.2 R36.1 U8.1
N$35: D12.C U9.1
N$36: CHG2.1 D12.A
N$37: CHG2.2 R37.1
N$38: R38.2 U9.5
N$39: D9.C R29.2
N$40: D9.A PWR2.1
N$41: D10.C R30.2
N$42: R40.1 U7.22
N$43: I2C3.3 R45.2
N$44: I2C3.1 R46.1
N$45: J16.B5 R47.2
N$46: J16.A5 R48.2
N$47: R50.2 U11.3
N$48: C19.1 D15.C Q4.2 R50.1 U11.1
N$49: D16.C U12.1
N$50: CHG3.1 D16.A
N$51: CHG3.2 R51.1
N$52: R52.2 U12.5
N$53: D13.C R43.2
N$54: D13.A PWR3.1
N$55: D14.C R44.2
N$56: R54.1 U10.22
N$57: I2C4.3 R59.2
N$58: I2C4.1 R60.1
N$59: J21.B5 R61.2
N$60: J21.A5 R62.2
N$61: R64.2 U14.3
N$62: C25.1 D19.C Q5.2 R64.1 U14.1
N$63: D20.C U15.1
N$64: CHG4.1 D20.A
N$65: CHG4.2 R65.1
N$66: R66.2 U15.5
N$67: D17.C R57.2
N$68: D17.A PWR4.1
N$69: D18.C R58.2
N$70: R68.1 U13.22
N$71: I2C5.3 R73.2
N$72: I2C5.1 R74.1
N$73: J26.B5 R75.2
N$74: J26.A5 R76.2
N$75: R78.2 U17.3
N$76: C31.1 D23.C Q6.2 R78.1 U17.1
N$77: D24.C U18.1
N$78: CHG5.1 D24.A
N$79: CHG5.2 R79.1
N$80: R80.2 U18.5
N$81: D21.C R71.2
N$82: D21.A PWR5.1
N$83: D22.C R72.2
N$84: R82.1 U16.22
SHLD: J1.SHLD1 J1.SHLD2 J1.SHLD3 J1.SHLD4 SHLD.1
SHLD1: J6.SHLD1 J6.SHLD2 J6.SHLD3 J6.SHLD4 SHLD1.1
SHLD2: J11.SHLD1 J11.SHLD2 J11.SHLD3 J11.SHLD4 SHLD2.1
SHLD3: J16.SHLD1 J16.SHLD2 J16.SHLD3 J16.SHLD4 SHLD3.1
SHLD4: J21.SHLD1 J21.SHLD2 J21.SHLD3 J21.SHLD4 SHLD4.1
SHLD5: J26.SHLD1 J26.SHLD2 J26.SHLD3 J26.SHLD4 SHLD5.1
V_BATT: C4.1 J3.1 J5.2 Q1.3 R13.2 U3.3
V_BATT1: C10.1 J8.1 J9.2 Q2.3 R27.2 U6.3
V_BATT2: C16.1 J13.1 J14.2 Q3.3 R41.2 U9.3
V_BATT3: C22.1 J18.1 J19.2 Q4.3 R55.2 U12.3
V_BATT4: C28.1 J23.1 J24.2 Q5.3 R69.2 U15.3
V_BATT5: C34.1 J28.1 J29.2 Q6.3 R83.2 U18.3
V_USB: C3.1 D3.A J1.VBUS1 J1.VBUS2 J3.2 Q1.1 R7.2 R9.2 U3.4
V_USB1: C9.1 D7.A J6.VBUS1 J6.VBUS2 J8.2 Q2.1 R21.2 R23.2 U6.4
V_USB2: C15.1 D11.A J11.VBUS1 J11.VBUS2 J13.2 Q3.1 R35.2 R37.2 U9.4
V_USB3: C21.1 D15.A J16.VBUS1 J16.VBUS2 J18.2 Q4.1 R49.2 R51.2 U12.4
V_USB4: C27.1 D19.A J21.VBUS1 J21.VBUS2 J23.2 Q5.1 R63.2 R65.2 U15.4
V_USB5: C33.1 D23.A J26.VBUS1 J26.VBUS2 J28.2 Q6.1 R77.2 R79.2 U18.4